# Altium PCB Capstone_Power.PcbDoc
Units mil, origin at the board's own origin, x right, y up, seen from the top; angles counter-clockwise.
Board outline 3050 x 2560 mil, 2 copper layers (Top Layer, Bottom Layer); 40 components, 27 nets, 139 pads, 27 vias.
Unrouted connection lines stored in the file: 4.
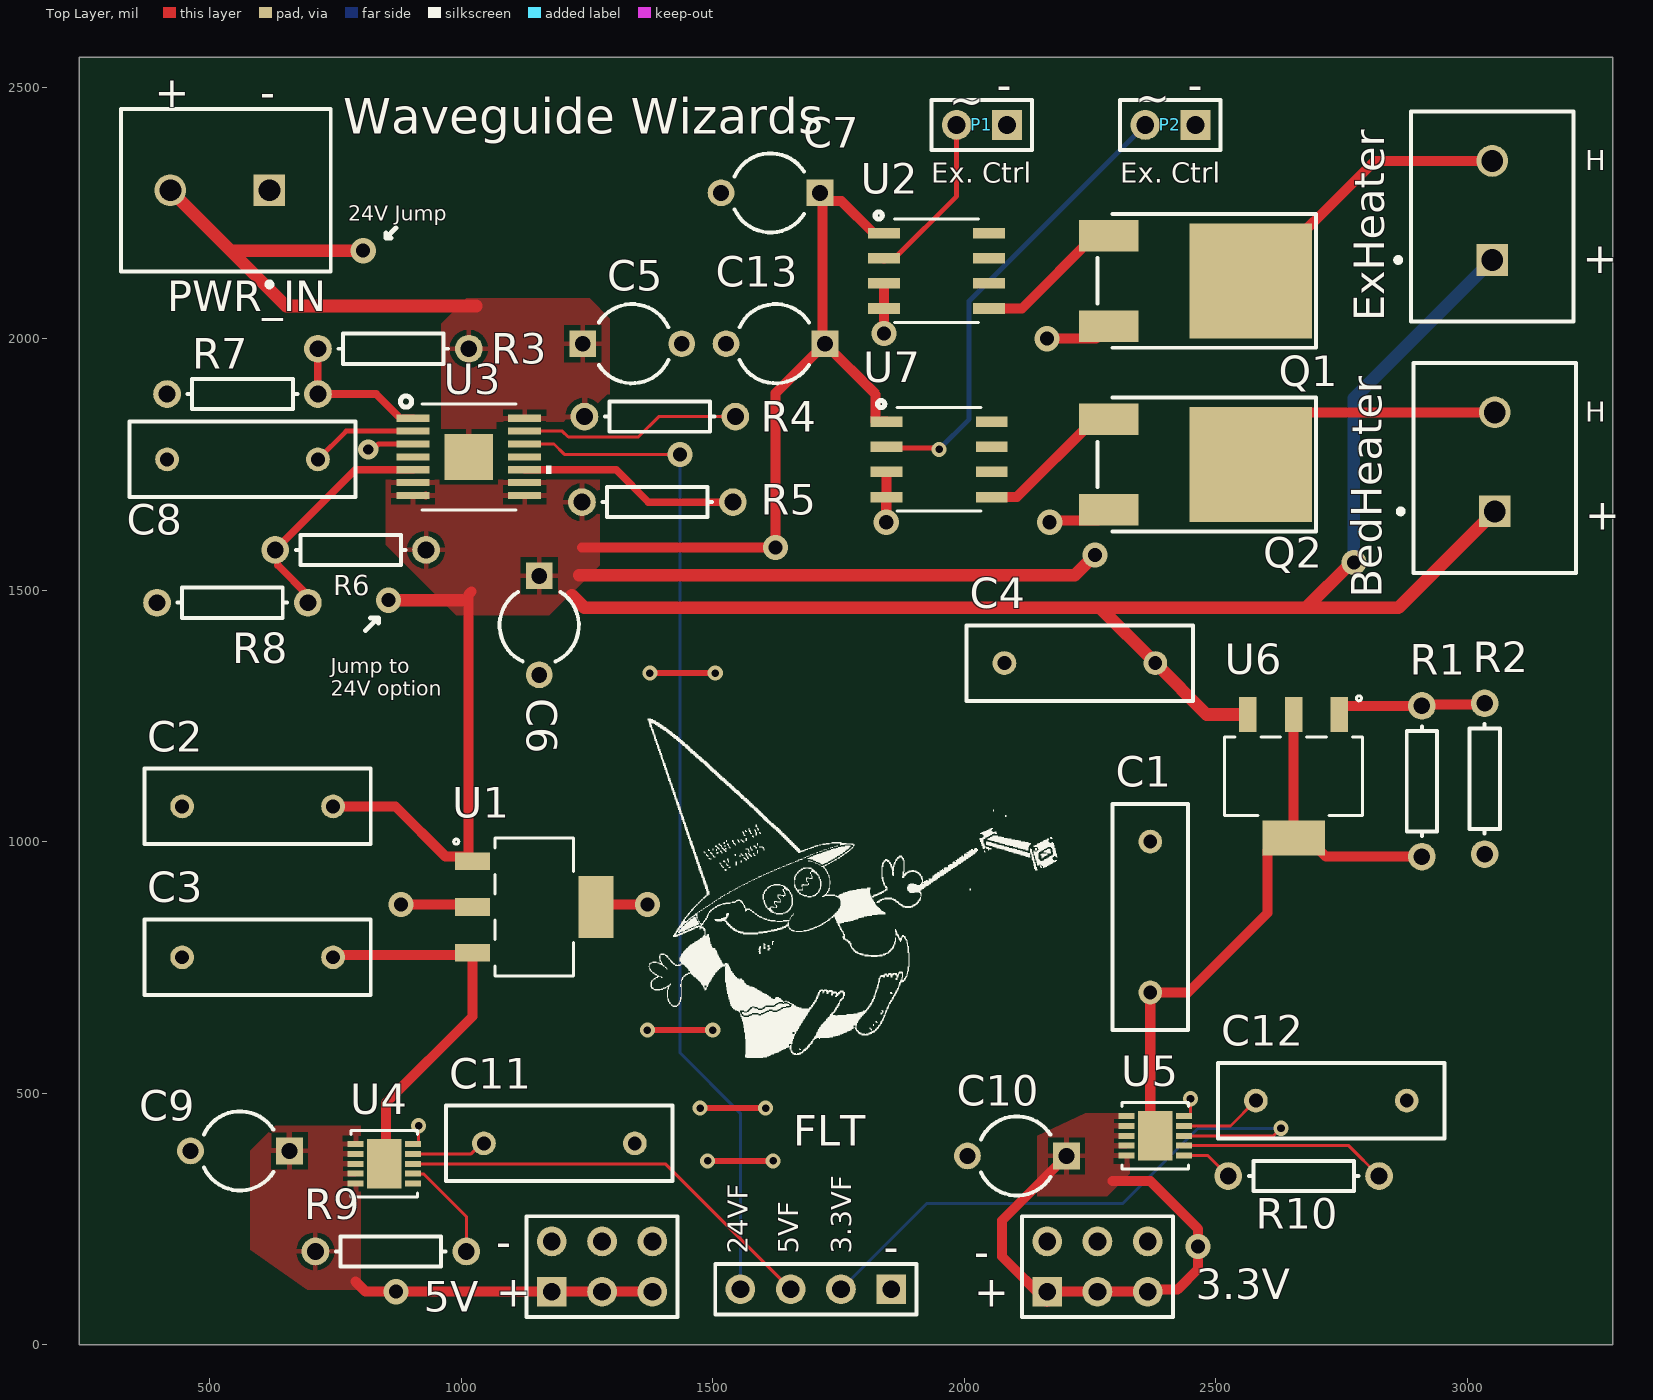
[diagram p0: Top Layer view]
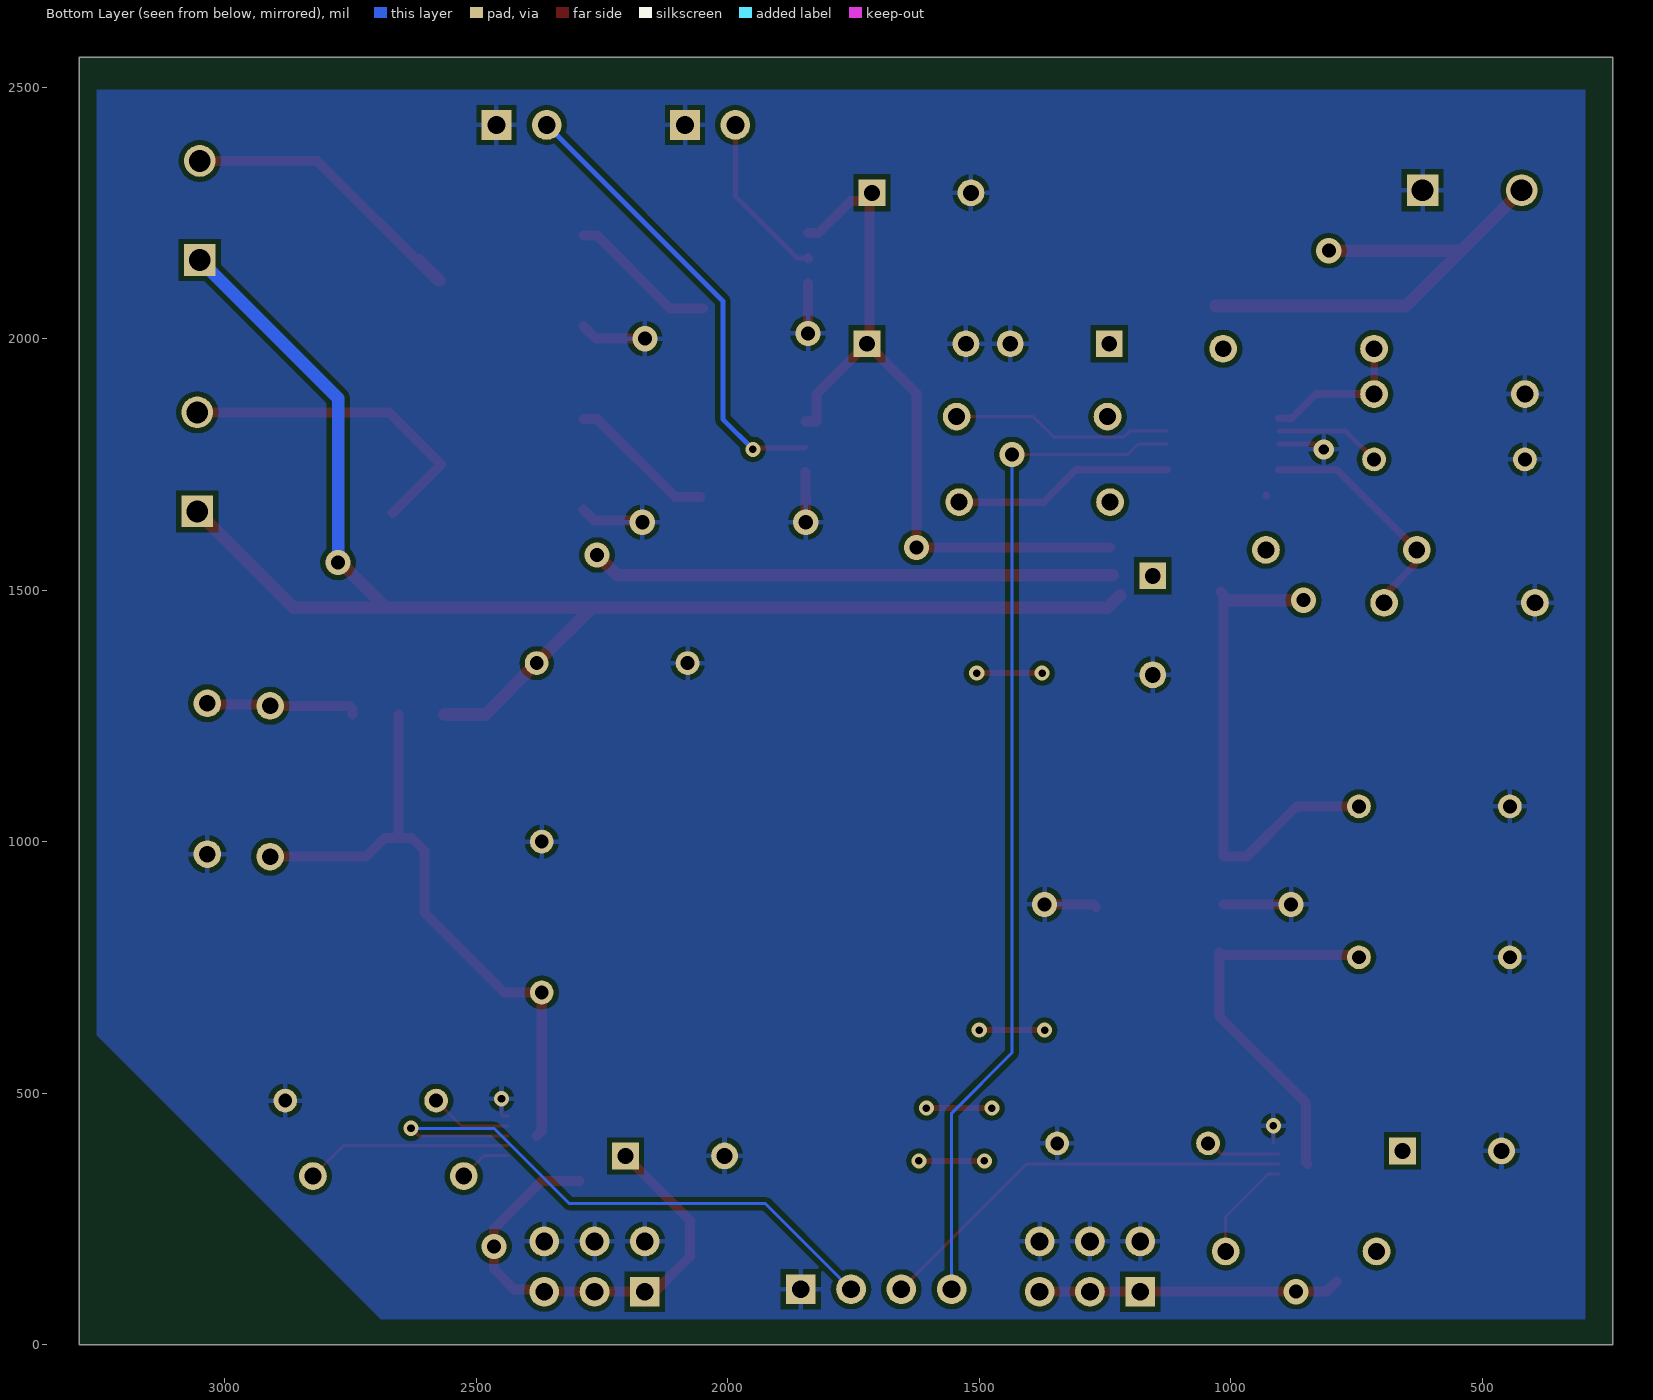
[diagram p1: Bottom Layer view, seen from below]

## Layer stack, top to bottom
Top Solder: solder mask 0.4, Solder Resist, Dk 3.5
Top Layer: signal copper 1.4
Dielectric 1: dielectric 12.6, FR-4, Dk 4.8
Bottom Layer: signal copper 1.4
Bottom Solder: solder mask 0.4, Solder Resist, Dk 3.5

## Board outline
240,0 240,2560 3290,2560 3290,0

## Design rules (kind name [scope] priority, off if disabled: settings)
Clearance [All] p1: gap=10 ignorepadtopadclearanceinfootprint=TRUE except(0: Arc-Hole Track-Hole SMDPad-Hole THPad-Hole Via-Hole Fill-Hole Poly-Hole Region-Hole Text-Hole; 6: SMDPad-SMDPad)
PolygonConnect [All] p1: connectstyle=Relief reliefconductorwidth=10 reliefentries=4 polygonreliefangle="90 Angle" airgapwidth=10
RoutingVias [All] p1: holewidth=28 width=50 viastyle="Through Hole" minholewidth=28 minwidth=50 maxholewidth=28 maxwidth=50
SolderMaskExpansion [All] p1: expansion=4
Width [All] p1: maxlimit=40 minlimit=6 preferedwidth=10
30 further rules are at their usual default settings.

## Components (designator, comment, footprint, x,y, rotation, side; value= is the part's Value field where it differs from the comment)
3.3V "Header 3X2" HDR2X3 2165,105 r0 top
5V "Header 3X2" HDR2X3 1180,105 r0 top
BedHeater "282836-2" TECO-282836-2_V 3055,1755 r90 top
C1 "10uF" RAD-0.3 2370,850 r270 top value=100pF
C2 "Cap" RAD-0.3 595,1070 r0 top value=100pF
C3 "Cap" RAD-0.3 595,770 r0 top value=100pF
C4 "10uF" RAD-0.3 2230,1355 r0 top value=100pF
C5 "47uF" CAPR5-4X5 1340,1990 r0 top value=100pF
C6 "47uF" CAPR5-4X5 1155,1430 r270 top value=100pF
C7 "10uF" CAPR5-4X5 1615,2290 r180 top value=100pF
C8 "100pF" RAD-0.3 565,1760 r0 top
C9 "10uF" CAPR5-4X5 560,385 r180 top value=100pF
C10 "10uF" CAPR5-4X5 2105,375 r180 top value=100pF
C11 "100pF" RAD-0.3 1195,400 r180 top
C12 "100pF" RAD-0.3 2730,485 r180 top
C13 "10uF" CAPR5-4X5 1625,1990 r180 top value=100pF
ExHeater "282836-2" TECO-282836-2_V 3050,2255 r90 top
FLT "Header 4" HDR1X4 1855,110 r180 top
P1 "Ex. Ctrl" HDR1X2 2085,2425 r180 top
P2 "Ex. Ctrl" HDR1X2 2460,2425 r180 top
PWR_IN "282836-2" TECO-282836-2_V 520,2295 r180 top
Q1 "SMD 60V 46A" SC_TO-252AA 2570,2115 r180 top
Q2 "SMD 60V 46A" SC_TO-252AA 2570,1750 r180 top
R1 "Res1" AXIAL-0.3 2910,1120 r270 top value=1K
R2 "Res1" AXIAL-0.3 3035,1125 r90 top value=1K
R3 "" AXIAL-0.3 865,1980 r0 top value=1K
R4 "" AXIAL-0.3 1395,1845 r180 top value=1K
R5 "" AXIAL-0.3 1390,1675 r180 top value=1K
R6 "" AXIAL-0.3 780,1580 r0 top value=1K
R7 "" AXIAL-0.3 565,1890 r0 top value=1K
R8 "" AXIAL-0.3 545,1475 r0 top value=1K
R9 "100" AXIAL-0.3 860,185 r180 top value=1K
R10 "100" AXIAL-0.3 2675,335 r180 top value=1K
U1 "Part Number: LM7805MPX/NOPB" DCY4 1145,870 r270 top value=Value
U2 "Part Number: MIC5014YM-TR" SOIC-8_M 1945,2135 r0 top value=Value
U3 "eFuse" PWP14 1015,1765 r0 top
U4 "5.0V eFuse" *DFN-10_DD 847,359.37 r0 top
U5 "3.3V eFuse" *DFN-10_DD 2380,415 r0 top
U6 "3.3V" DCY4 2655,1130 r180 top value=Value
U7 "Part Number: MIC5014YM-TR" SOIC-8_M 1950,1760 r0 top value=Value

## Footprints (in the part's own frame and the unit in brackets; to place one, negate y for a bottom-side part, rotate by r counter-clockwise, add the part's x,y. Pads: shape width x height; smd on the part's side, far side on the other; paste and mask are expansions set on the pad)
*DFN-10_DD [mil]
  rect 32x12 smd: 1(-57,39.37) 2(-57,19.69) 3(-57,0) 4(-57,-19.69) 5(-57,-39.37) 6(57,-39.37) 7(57,-19.69) 8(57,0) 9(57,19.69) 10(57,39.37)
  rect 69x98 smd: 11(0,0)
  silkscreen extent -66,-66 66,66
AXIAL-0.3 [mm] "Axial Device, Thru-Hole; 2 Leads; 0.3 in Pin Spacing"
  round 1.4 hole 0.85: 1(-3.81,0) 2(3.81,0)
  silkscreen extent -2.77,-0.76 2.77,0.76
CAPR5-4X5 [mm] "Capacitor; 2 Leads"
  rect 1.35x1.35 hole 0.8: 1(-2.5,0)
  round 1.35 hole 0.8: 2(2.5,0)
  silkscreen extent -1.69,-2 1.82,2
DCY4 [mil]
  rect 35x69.5 smd paste+0 mask+0: 1(-91,-122.75) 2(0,-122.75) 3(91,-122.75)
  rect 124x69.5 smd paste+0 mask+0: 4(0,122.75)
  silkscreen extent -137,-160 137,78, body extent -132,-144 132,144, height 67
HDR1X2 [mm] "Connector; Header; 2 Position"
  rect 1.5x1.5 hole 0.9: 1(0,0)
  round 1.5 hole 0.9: 2(2.54,0)
  silkscreen extent -1.27,-1.27 3.81,1.27
HDR1X4 [mm] "Connector; Header; 4 Position"
  rect 1.5x1.5 hole 0.9: 1(0,0)
  round 1.5 hole 0.9: 2(2.54,0) 3(5.08,0) 4(7.62,0)
  silkscreen extent -1.27,-1.27 8.89,1.27
HDR2X3 [mm] "Connector; Header; 3x2 Position"
  rect 1.5x1.5 hole 0.9: 1(0,0)
  round 1.5 hole 0.9: 2(0,2.54) 3(2.54,0) 4(2.54,2.54) 5(5.08,0) 6(5.08,2.54)
  silkscreen extent -1.27,-1.27 6.35,3.81
PWP14 [mil]
  rect 66x14 smd: 1(-111,76.77) 2(-111,51.18) 3(-111,25.59) 4(-111,0) 5(-111,-25.59) 6(-111,-51.18) 7(-111,-76.77) 8(111,-76.77) 9(111,-51.18) 10(111,-25.59) 11(111,0) 12(111,25.59) 13(111,51.18) 14(111,76.77)
  rect 97x91 smd paste-48 mask+0: EPAD(0,0)
  silkscreen extent -136,-106 164,121, body extent -130,-101 130,100, height 47
RAD-0.3 [mm] "Radial Cap, Thru-Hole; 2 Leads; 0.3 in Pin Spacing"
  round 1.2 hole 0.7: 1(-3.81,0) 2(3.81,0)
  silkscreen extent -5.71,-1.91 5.71,1.91
SC_TO-252AA [mm] "D-PAK"
  rect 3x1.6 smd: 1(7.18,-2.286) 3(7.18,2.286)
  rect 6.2x5.8 smd: 2(0,0)
  silkscreen extent -3.3,-3.38 7.75,3.38, body extent -2.7,-3.29 7,3.29, height 2.3
SOIC-8_M [mil]
  rect 63x21 smd: 1(-104.5,75) 2(-104.5,25) 3(-104.5,-25) 4(-104.5,-75) 5(104.5,-75) 6(104.5,-25) 7(104.5,25) 8(104.5,75)
  silkscreen extent -122,-103 84,117, body extent -122,-98 122,98, height 66
TECO-282836-2_V [mm] "Female Header, Pitch 5mm, 1 x 2 Position, Height 10mm"
  rect 1.6x1.6 hole 1.1: 1(-2.5,0)
  round 1.6 hole 1.1: 2(2.5,0)
  silkscreen extent -5.6,-4.1 5,4.87, body extent -5.6,-4.1 5,4.1, height 10

## Part data
3.3V 5V: "Header, 3-Pin, Dual row", LatestRevisionDate=17-Jul-2002, LatestRevisionNote="Re-released for DXP Platform.", Publisher="Altium Limited"
BedHeater ExHeater PWR_IN: library part CMP-1684-00017-1, "Female Header, Pitch 5 mm, 1 x 2 Position, Height 10 mm, Tail Length 3.5 mm, Rohs, Bulk", Color=Green, Current=13.5A, Manufacturer="TE Connectivity", Package Description="Female Header, Pitch 5 mm, 1 x 2 Position, Height 10 mm, Tail Length 3.5 mm", Package Reference=THD, Standard Package=300, Voltage=300V, 3D Model=282836-2.pdf, Category=Connectors,Interconnects, Clamp Material - Plating=Brass-NickelPlated, Contact Material - Plating=Brass-TinPlated, Datasheet URL=http://www.te.com.cn/commerce/DocumentDelivery/DDEController?Action=showdoc&DocId=Catalog+Section%7F1308389_EUROSTYLE_TERMINAL_BLOCKS%7F0607%7Fpdf%7FEnglish%7FENG_CS_1308389_EUROSTYLE_TERMINAL_BLOCKS_0607.pdf%7F282836-2, Dynamic Catalog=BuchananSeries, Family=TerminalBlocks-WiretoBoard, Featured Product=EurostyleTerminalBlockConnectors, Features=Interlocking(Side), Housing Material=Polyamide(PA66),Nylon6/6, Manufacturer URL=http://www.te.com, Mating Orientation=HorizontalwithBoard, Mounting Type=ThroughHole, Number of Levels=1, Other Names="5ULV-02B / A98076", Packaging=Bulk, Pitch="0.197\"(5.00mm)", Positions Per Level=2, Product Training Modules=Wire-to-BoardEurostyleTerminalBlocks, RoHS Information=282836-2StatementofCompliance, Screw Material - Plating=Brass-NickelPlated, Screw Thread=M3, Series=Buchanan, Torque - Screw=0.68Nm(6Lb-In), Wire Gauge=16-30AWG, Wire Termination=Screw-RisingCageClamp
C1 C4 C8 C11 C12: library part Cap, "Capacitor", LatestRevisionDate=17-Jul-2002, LatestRevisionNote="Re-released for DXP Platform.", PackageDescription="Radial Cap, Thru-Hole; 2 Leads; 0.3 in Pin Spacing", PackageReference=RAD-0.3, Published=8-Jun-2000, Publisher="Altium Limited"
C2 C3: "Capacitor", LatestRevisionDate=17-Jul-2002, LatestRevisionNote="Re-released for DXP Platform.", PackageDescription="Radial Cap, Thru-Hole; 2 Leads; 0.3 in Pin Spacing", PackageReference=RAD-0.3, Published=8-Jun-2000, Publisher="Altium Limited"
C5 C6 C7 C9 C10 C13: library part Cap2, "Capacitor", PackageDescription="Capacitor; 2 Leads", PackageReference=CAPR5-4X5, Published=23-Sep-2002, Publisher="Altium Limited"
FLT: "Header, 4-Pin", LatestRevisionDate=17-Jul-2002, LatestRevisionNote="Re-released for DXP Platform.", Publisher="Altium Limited"
P1 P2: library part "Header 2", "Header, 2-Pin", LatestRevisionDate=17-Jul-2002, LatestRevisionNote="Re-released for DXP Platform.", Publisher="Altium Limited"
Q1 Q2: library part NTD5865NLT4G, "N-Channel 60V 46A (Tc) 71W (Tc) Surface Mount DPAK", ComponentLink1Description=Digikey, ComponentLink1URL=https://www.digikey.com/product-detail/en/on-semiconductor/NTD5865NLT4G/NTD5865NLT4GOSCT-ND/2409629
R1 R2: "Resistor", LatestRevisionDate=17-Jul-2002, LatestRevisionNote="Re-released for DXP Platform.", PackageDescription="Axial Device, Thru-Hole; 2 Leads; 0.3 in Pin Spacing", PackageReference=AXIAL-0.3, Published=8-Jun-2000, Publisher="Altium Limited"
R3 R4 R5 R6 R7 R8 R9 R10: library part Res1, "Resistor", LatestRevisionDate=17-Jul-2002, LatestRevisionNote="Re-released for DXP Platform.", PackageDescription="Axial Device, Thru-Hole; 2 Leads; 0.3 in Pin Spacing", PackageReference=AXIAL-0.3, Published=8-Jun-2000, Publisher="Altium Limited"
U1: library part LM7805MPX/NOPB, "No Description Available", Built_By=EMA_Jessica, Copyright="Copyright (C) 2018 Accelerated Designs. All rights reserved", Manufacturer_Part_Number=LM7805MPX/NOPB, RefDes=RefDes, Type=DEV, Vendor="Texas Instruments"
U2 U7: library part MIC5014YM-TR, "No Description Available", Built_By=EMA_Jessica, Copyright="Copyright (C) 2018 Accelerated Designs. All rights reserved", Manufacturer_Part_Number=MIC5014YM-TR, RefDes=RefDes, Type=DEV, Vendor=Microchip
U3: library part STEF01, "8V-48V 4A eFuse"
U4: library part STEF05, "The STEF05D is an integrated electronic fuse / optimized for monitoring output current and input / voltage. Connected in series to a 5 V rail, it is / capable of protecting the electronic circuitry on its / output from overcurrent and overvoltage. The / device has a controlled delay and turn-on time. / When an overload condition occurs, the / STEF05D limits the output current to a predefined / safe value. If the anomalous overload condition. / persists, it goes into an open state, disconnecting / the load from the power supply. If a continuous / short-circuit is present on the board, when power / is re-applied the E-fuse initially limits the output / current to a safe value, and then again goes into / an open state."
U5: library part STEF033
U6: library part LM317DCYR, "Part Number: LM317DCYR", Built_By=EMA_UL_Team, ComponentLink1Description=Digikey, ComponentLink1URL=https://www.digikey.com/product-detail/en/texas-instruments/LM317DCYR/296-12602-1-ND/443738, ComponentLink2Description=Datasheet, ComponentLink2URL=http://www.ti.com/lit/ds/symlink/lm317.pdf, Copyright="Copyright (C) 2018 Accelerated Designs. All rights reserved", Manufacturer_Part_Number=LM317DCYR, RefDes=RefDes, Type=DEV, Vendor="Texas Instruments"

## Via types
v1: diameter 50, hole 28, Top Layer to Bottom Layer, 14 vias
v2: diameter 30, hole 15, Top Layer to Bottom Layer, 12 vias
v3: diameter 40, hole 20, Top Layer to Bottom Layer, 1 vias

## Nets (pads, with @x,y where several pads share a name; then routed paths per layer and width w, separated by ;. In a path a pad name is that pad's centre, name@x,y a point inside that pad or via, vN(x,y) a via of type N, cw(c..) or ccw(c..) an arc to the next point about the centre after c; other vN are vias at no path point)
3V3: 3.3V.1 3.3V.3 3.3V.5 C10.1 U5.1 U5.2 U5.3 U5.4 U5.5 | length 988.5
  Top Layer w20: 3.3V.1@2165,85 2075,175 2075,246.57 C10.1 ; 3.3V.1 3.3V.3 3.3V.5 2369.53,109.53 2424.53,109.53 2465,150 v1(2465,195) 2465,230 2370,325 2295,325
5V: 5V.1 5V.3 5V.5 C9.1 R9.2 U4.1 U4.2 U4.3 U4.4 U4.5 | length 598.3
  Top Layer w20: 790,125 810,105 5V.1 5V.3 5V.5
  other v1: 870,105
24V: BedHeater.1 C2.2 C4.2 C6.1 C7.1 C13.1 ExHeater.1 R5.2 R6.2 U1.1 U2.1 U3.6 U3.7 U3.8 U3.9 U6.3 U7.1 | length 6704.6
  Top Layer w15: U3.7@929,1688.23 U3.7@929.5,1687.73 ; R6.2@929.5,1580.5 R6.2
  Top Layer w20: C2.2 869,1070 969,970 1014,970 1014,1491 1020,1497 ; 1240,1585 v1(1625,1585) 1625,1891.57 C13.1 ; C7.1@1717.93,2294.5 C7.1 C7.1@1718.43,2285 ; U2.1 1819.5,2210 1756.08,2273.43 1730,2273.43 C7.1@1718.43,2285 ; U7.1 1824.5,1835 1824,1835.5 1824,1889.42 C13.1 ; C7.1@1718.43,2285 1718.43,1995 C13.1
  Top Layer w25: v1(855,1480) 1000,1480 ; 1220,1490 1245,1465 2270,1465 ; 1235,1530 2220,1530 v1(2260,1570) ; U6.3 2482.25,1252.75 C4.2 2270,1465 ; v1(2775,1555) 2770,1555 2680,1465 ; BedHeater.1 2863.43,1465 2680,1465 ; 2270,1465 2680,1465
  Bottom Layer w25: v1(2260,1570) v1@2265,1570 ; v1@2770,1555 v1(2775,1555) 2775,1881.57 ExHeater.1
24V_IN: C5.1 PWR_IN.2 R3.2 R4.2 U3.14 U3.EPAD | length 977.2
  Top Layer w15: R4.2@1241.27,1841.27 R4.2 ; C5.1 C5.1@1245,1986.58
  Top Layer w25: PWR_IN.2 541.57,2175 ; v1(805,2175) 541.57,2175 ; 1030,2065 651.57,2065 541.57,2175
GND: 3.3V.2 3.3V.4 3.3V.6 5V.2 5V.4 5V.6 C1.1 C2.1 C3.1 C4.1 C5.2 C6.2 C7.2 C8.1 C9.2 C10.2 C11.1 C12.1 C13.2 FLT.1 P1.1 P2.1 PWR_IN.1 Q1.3 Q2.3 R2.1 R7.1 R8.1 U1.2 U1.4 U2.3 U2.4 U3.3 U4.10 U5.10 U7.3 U7.4 | length 872.4
  Top Layer w6: U4.10@915,400 v2(915,435) ; U5.10 2447,454.37 2450,457.37 v2(2450,488.74)
  Top Layer w10: v3(815,1780) 825,1780 835.59,1790.59 U3.3
  Top Layer w20: v1(880,875) U1.2@1014,875 ; U1.4 1272.75,875 v1(1370,875) ; v1(1840.5,2010.5) U2.4 U2.3 ; v1(1845,1635) 1845,1684.5 U7.4 U7.3 ; v1(2165,2000) 2262.32,2000 Q1.3 ; v1(2170,1635) 2173.5,1638.5 2265.83,1638.5 Q2.3
NetBedHeater_2: BedHeater.2 Q2.2 | length 664.8
  Top Layer w20: Q2.2@2666.85,1653.15 Q2.2 2673.43,1853.43 BedHeater.2
NetC8_2: C8.2 U3.2 | length 212.3
  Top Layer w10: C8.2 771.18,1816.18 U3.2
NetC11_2: C11.2 U4.9 | length 149.7
  Top Layer w6: U4.9 1019.81,379.06 1040.76,400 C11.2
NetC12_2: C12.2 U5.9 | length 163.8
  Top Layer w6: U5.9 2529.68,434.69 C12.2
NetExHeater_2: ExHeater.2 Q1.2 | length 639.8
  Top Layer w20: Q1.2@2613.15,2158.15 Q1.2 2577.87,2115 2816.3,2353.43 ExHeater.2
NetFLT_2: FLT.2 U5.8 | length 1206.8
  Top Layer w6: U5.8 2615,415 v2(2630,430)
  Bottom Layer w6: FLT.2 1925,280 2315,280 2465,430 v2(2630,430)
NetFLT_3: FLT.3 U4.8 | length 854.3
  Top Layer w6: U4.8 1405.63,359.37 FLT.3
NetFLT_4: FLT.4 U3.12 | length 2027.2
  Top Layer w6: U3.12 1184.41,1790.59 1205,1770 v1(1435,1770)
  Bottom Layer w6: v1(1435,1770) 1435,580 1555,460 FLT.4
NetP1_2: P1.2 U2.2 | length 337.9
  Top Layer w10: U2.2 1861.5,2160 1985,2283.5 P1.2
  Top Layer w20: U2.2 U2.2@1841,2160.5
NetP2_2: P2.2 U7.2 | length 921.4
  Top Layer w10: U7.2 1848,1782.5 1947.5,1782.5 v2(1950,1780)
  Bottom Layer w10: v2(1950,1780) 2010,1840 2010,2075 P2.2
NetQ1_1: Q1.1 U2.5 | length 297.9
  Top Layer w20: U2.5 2114.76,2060 2259.76,2205 Q1.1
NetQ2_1: Q2.1 U7.5 | length 297
  Top Layer w20: U7.5 2104.76,1685 2259.76,1840 Q2.1
NetR1_1: R1.1 R2.2 U6.1 | length 303.9
  Top Layer w20: U6.1 2746,1262.5 2753.5,1270 R1.1 2912.5,1272.5 3032.5,1272.5 R2.2
NetR3_1: R3.1 R7.2 U3.1 | length 299
  Top Layer w15: R3.1 R7.2 830.77,1890 879,1841.77 U3.1
NetR4_1: R4.1 U3.13 | length 440.7
  Top Layer w6: U3.13 1201.03,1816.18 1212.77,1804.44 1351.96,1804.44 1392.52,1845 R4.1
NetR5_1: R5.1 U3.10 | length 440.7
  Top Layer w15: U3.10 1307.87,1739.41 1372.28,1675 R5.1
NetR6_1: R6.1 R8.2 U3.5 | length 472
  Top Layer w12: R6.1 635.56,1574.44 635.56,1549.44 ; R8.2 R8.2@695,1490
  Top Layer w15: R6.1 789.41,1739.41 U3.5 ; 635.56,1549.44 R8.2@695,1490
NetR9_1: R9.1 U4.7 | length 210.7
  Top Layer w6: U4.7 904.69,339 925.38,339 1010,254.38 R9.1
NetR10_1: R10.1 U5.7 | length 413
  Top Layer w6: U5.7 2764.68,395.31 R10.1
NetR10_2: R10.2 U5.6 | length 104.8
  Top Layer w6: U5.6 2484.37,375.63 R10.2
Unchecked_3V3: C1.2 R1.2 U5.11 U6.2 U6.4 | length 1290.3
  Top Layer w20: U5.11 2370,425 C1.2 2445,700 2603,858 2603,982.5 2627.75,1007.25 U6.4 ; U6.2 U6.4 ; R1.2 2719.5,970 2682.25,1007.25 U6.4
Unchecked_5V: C3.2 U1.3 U4.11 | length 773.2
  Top Layer w20: C3.2 749.5,774.5 1017.75,774.5 U1.3 1022.25,652.25 850,480 850,362.37 U4.11
pads on no net: U2.6 U2.7 U2.8 U3.4 U3.11 U4.6 U7.6 U7.7 U7.8
copper on no net: | length 520
  Top Layer w12: v2(1370,625) v2(1500,625) ; v2(1375,1335) v2(1505,1335) ; v2(1475,470) v2(1605,470) ; v2(1490,365) v2(1620,365)

## Polygon pours and split planes (outlines as drawn)
5V on Top Layer "Top Layer-5V" (solid, pour order 12): 580,188.67 580,385 630,435 800,435 800,295 800,108.59 693.9,108.59
3V3 on Top Layer "Top Layer-3V3" (solid, pour order 16): 2329.06,460 2329.06,339.24 2284.82,295 2205,295 2145,295 2145,415 2240.83,460
no net on Top Layer "Top Layer-No Net" (solid, pour order 14): 2045,545
24V_IN on Top Layer "Top Layer-24V_IN" (solid, pour order 8): 1070,1720 960,1720 960,2030 1010,2080 1255,2080 1295,2040 1295,1890 1290,1890 1235,1835 1070,1835
24V on Top Layer "Top Layer-24V" (solid, pour order 0): 850,1720 1275,1720 1275,1550 1175,1450 990,1450 850,1590
GND on Bottom Layer "Bottom Layer-GND" (solid, pour order 18): 2690,50 3255,615 3255,2495 2790,2495 295,2495 295,2460 295,50 330,50

## Silkscreen, mask and mechanical layers (free items; w line width, h text height)
Top Overlay:
  drawing of 120 lines, arcs and shapes, not listed
  text "-" at 2065,2475 h60
  text "-" at 2445,2475 h60
  text "+" at 390,2460 h60
  text "-" at 600,2460 h60
  text "~" at 2340,2450 h60
  text "~" at 1970,2445 h60
  text "Waveguide Wizards" at 765,2385 h120
  text "H" at 3235,2335 h40
  text "24V Jump" at 775,2235 h30
  text "+" at 3230,2130 h60
  text "H" at 3235,1835 h40
  text "+" at 3235,1620 h60
  text "Jump to  / 24V option" at 740,1290 h30
  text "24VF" at 1570,180 h40 r90
  text "5VF" at 1670,180 h40 r90
  text "3.3VF" at 1775,180 h40 r90
  text "-" at 1070,175 h60
  text "-" at 1840,165 h60
  text "-" at 2020,155 h60
  text "+" at 1070,75 h60
  text "+" at 2020,75 h60
Mechanical 1:
  the board outline again, w25

## Text inside footprints (layer, text, board x,y; h text height)
U2: Mechanical 13 "*" at 1869,2180 h50
U3: Mechanical 13 "*" at 929,1812.5 h50
U7: Mechanical 13 "*" at 1874,1805 h50